# Altium PCB LINKER.PcbDoc (part 1 of 2)
Units mm, origin at the board's own origin, x right, y up, seen from the top; angles counter-clockwise.
Board outline 200 x 129 mm, 4 copper layers (Top Layer, Mid1, Mid2, Bottom Layer), stack 0.603 mm thick; 27 components, 98 nets, 425 pads, 14 vias.
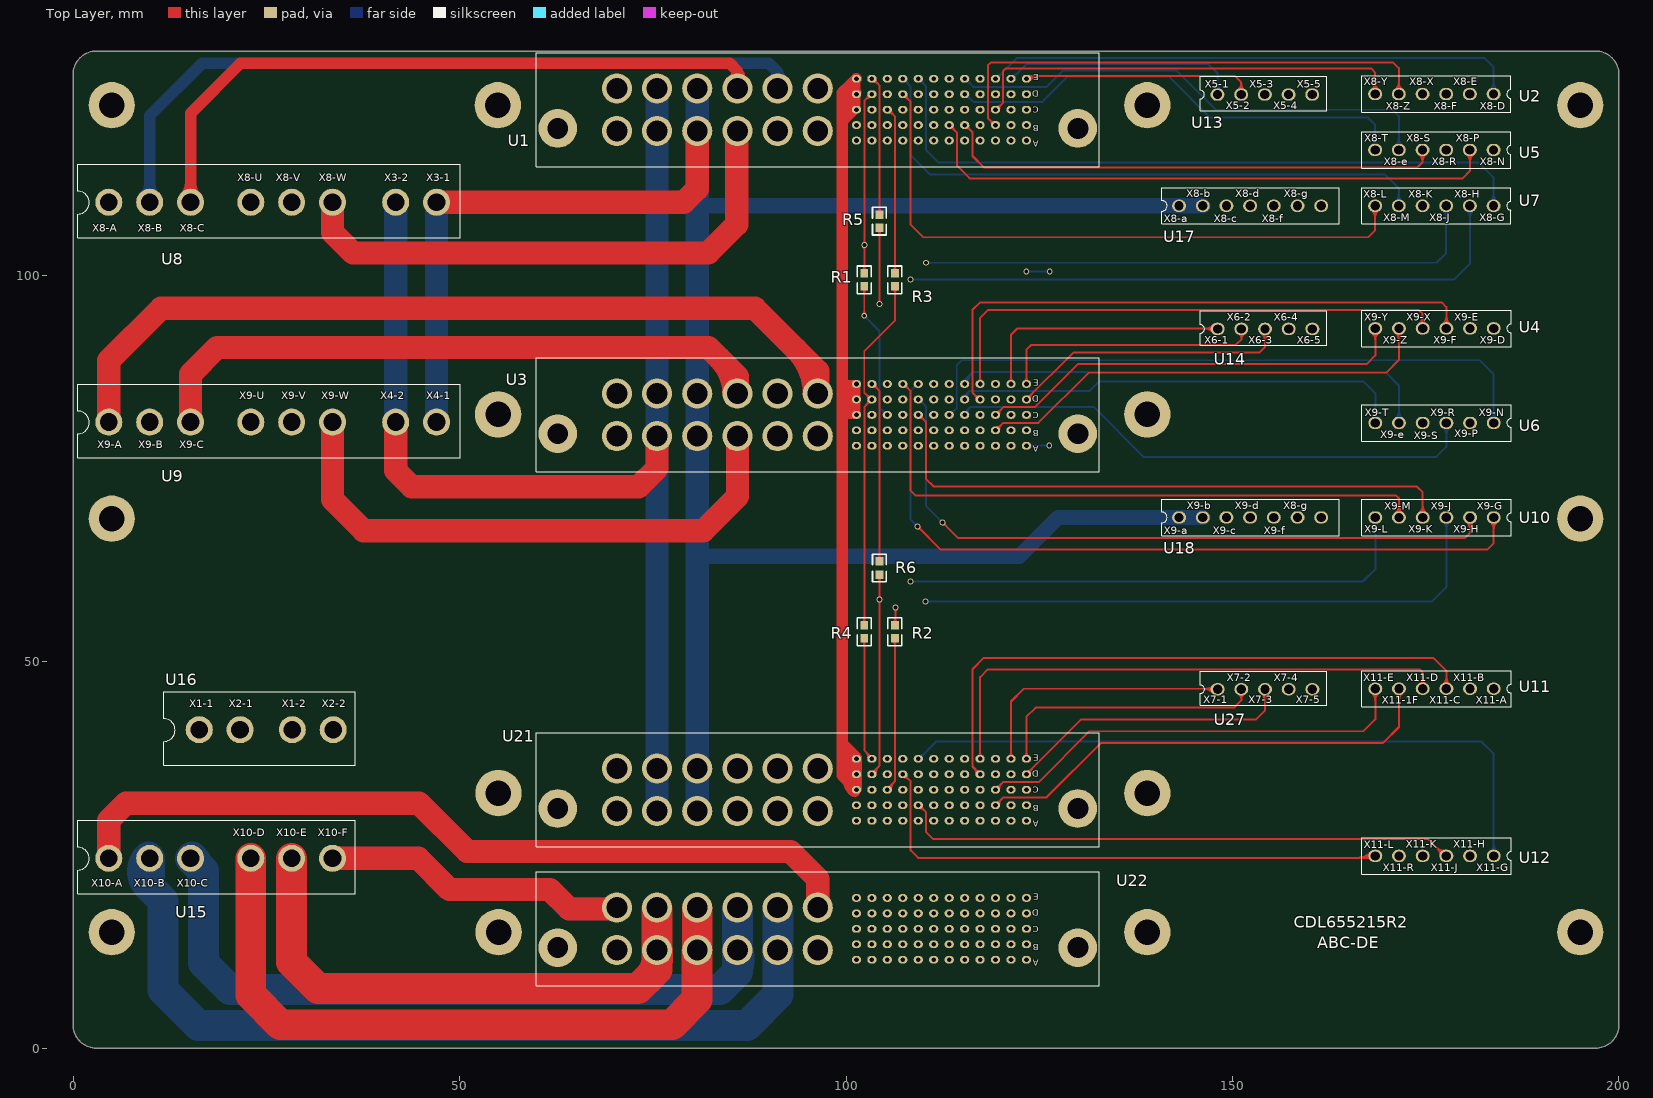
[diagram p0: Top Layer view]
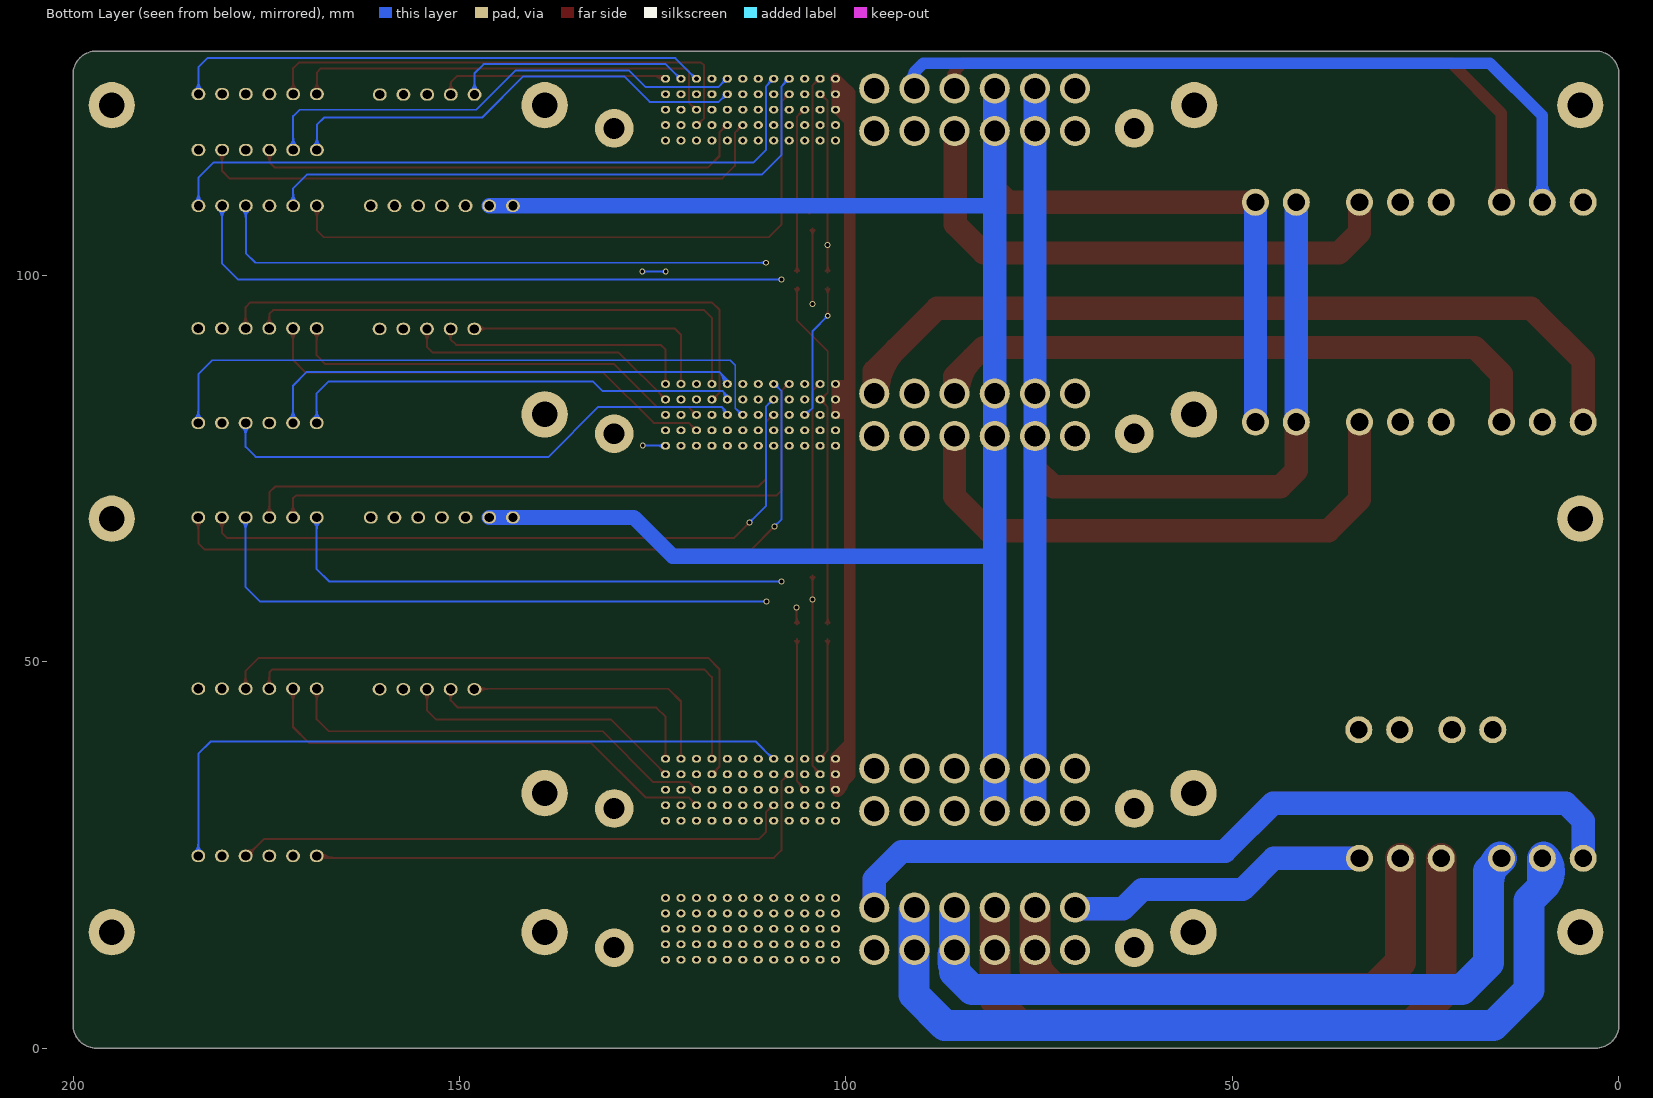
[diagram p1: Bottom Layer view, seen from below]
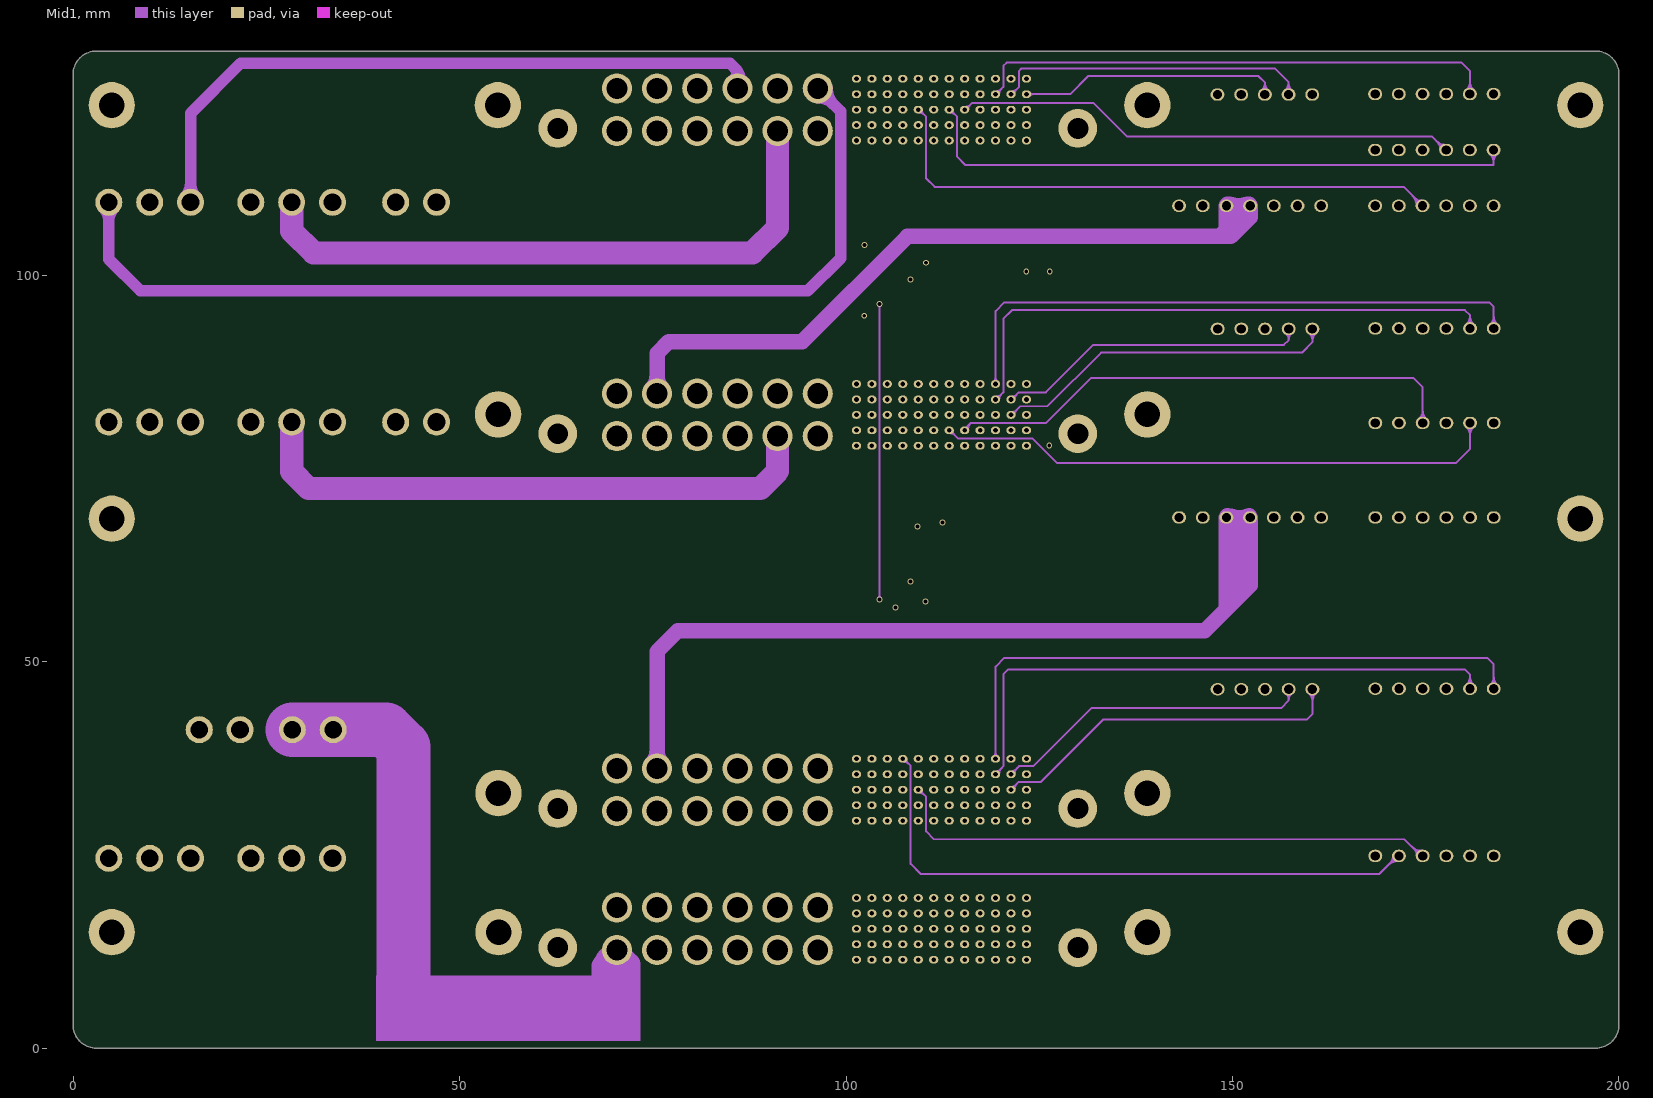
[diagram p2: Mid1]
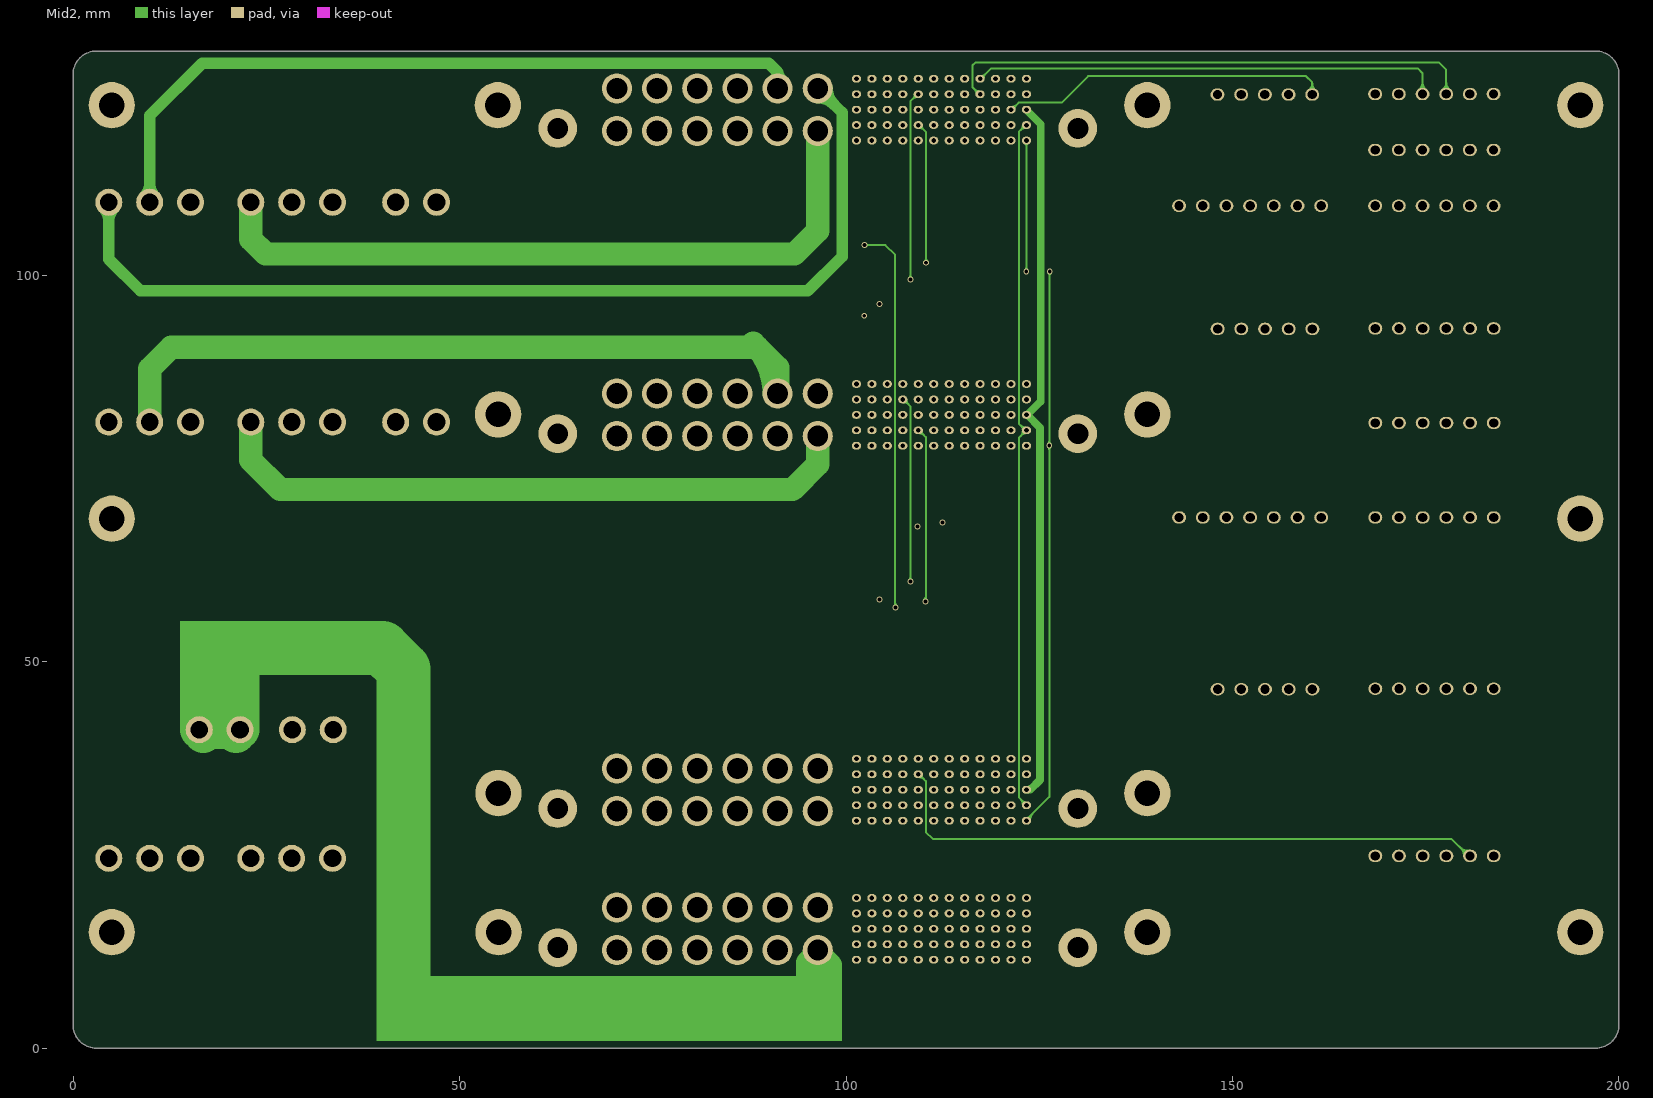
[diagram p3: Mid2]

## Layer stack, top to bottom
Top Solder: solder mask 0.0102, Solder Resist, Dk 3.5
Top Layer: signal copper 0.0356
Dielectric1: prepreg 0.0711, PP-006, Dk 4.1
Mid1: signal copper 0.035
Dielectric2: prepreg 0.0711, PP-006, Dk 4.1
Mid2: signal copper 0.035
Dielectric3: dielectric 0.32, FR-4, Dk 4.8
Bottom Layer: signal copper 0.0356
Bottom Solder: solder mask 0.0102, Solder Resist, Dk 3.5

## Board outline
0,3 0,126 cw(c3,126) 3,129 197,129 cw(c197,126) 200,126 200,3 cw(c197,3) 197,0 3,0 cw(c3,3)

## Design rules (kind name [scope] priority, off if disabled: settings)
Clearance Clearance_3 [InNetClass('HVGNDVCC') vs InNet('SYNC_OUT2')] p1: gap=0.254 ignorepadtopadclearanceinfootprint=FALSE except(0: Arc-Hole Track-Hole SMDPad-Hole THPad-Hole Via-Hole Fill-Hole Poly-Hole Region-Hole Text-Hole)
Clearance Clearance_2 [InNetClass('HVGNDVCC') vs InNet('SYNC_OUT1')] p2: gap=0.254 ignorepadtopadclearanceinfootprint=FALSE except(0: Arc-Hole Track-Hole SMDPad-Hole THPad-Hole Via-Hole Fill-Hole Poly-Hole Region-Hole Text-Hole)
Clearance Clearance_1 [InNetClass('HV')] p3: gap=0.5 ignorepadtopadclearanceinfootprint=FALSE except(0: Arc-Hole Track-Hole SMDPad-Hole THPad-Hole Via-Hole Fill-Hole Poly-Hole Region-Hole Text-Hole)
Clearance Clearance_board [InNetClass('HV') vs InNetClass('HV')] p4: gap=0.5 ignorepadtopadclearanceinfootprint=FALSE except(0: Arc-Hole Track-Hole SMDPad-Hole THPad-Hole Via-Hole Fill-Hole Poly-Hole Region-Hole Text-Hole)
Clearance [All] p5: gap=0.254 ignorepadtopadclearanceinfootprint=FALSE except(0: Arc-Hole Track-Hole SMDPad-Hole THPad-Hole Via-Hole Fill-Hole Poly-Hole Region-Hole Text-Hole)
FabricationTestpoint [(IsPad And (OnTopLayer Or OnBottomLayer))] p1: side=3 testpointundercomponent=TRUE minsize=1.016 maxsize=2.54 preferedsize=1.524 minholesize=0 maxholesize=1.016 preferedholesize=0.813 testpointgrid=0.025 allowsidetop=TRUE allowsidebottom=TRUE usegrid=TRUE gridtolerance=0
HoleSize [All] p1: absolutevalues=TRUE maxlimit=5 minlimit=0.025 maxpercent=80.000 minpercent=20.000
HoleToHoleClearance [All] p1: gap=0.05 allowstackedmicrovias=TRUE
MinimumSolderMaskSliver [All] p1: minsoldermaskwidth=0.05
PolygonConnect [All] p1: connectstyle=Relief reliefconductorwidth=0.254 reliefentries=4 polygonreliefangle="90 Angle" airgapwidth=0.254
RoutingVias [All] p1: holewidth=0.508 width=0.762 viastyle="Through Hole" minholewidth=0.508 minwidth=0.762 maxholewidth=0.508 maxwidth=0.762
SilkToSilkClearance [All] p1: silktosilkclearance=0.05
SilkToSolderMaskClearance [IsPad] p1: minsilkscreentomaskgap=0.05 clearancetoexposedcopper=TRUE
SolderMaskExpansion [All] p1: expansion=0.102
Width [All] p1: maxlimit=7 minlimit=0.254 preferedwidth=0.254
24 further rules are at their usual default settings.

## Components (designator, comment, footprint, x,y, rotation, side; value= is the part's Value field where it differs from the comment)
R1 "1k" R1608-0603 102.369,99.395 r270 top
R2 "1k" R1608-0603 106.331,53.863 r270 top
R3 "1k" R1608-0603 106.331,99.395 r90 top
R4 "1k" R1608-0603 102.369,53.863 r270 top
R5 "1k" R1608-0603 104.331,107.01 r90 top
R6 "1k" R1608-0603 104.331,62.118 r90 top
U1 "LRM5-A60H12RB-Z1" LRM5-A60H12RB-Z1 96.35,121.43 r180 top locked
U2 "SINCOS" SINCOS 176.124,123.444 r180 top
U3 "LRM5-A60H12RB-Z1" LRM5-A60H12RB-Z1 96.35,81.93 r180 top locked
U4 "SINCOS" SINCOS 176.145,93.122 r180 top
U5 "SINCOS" SINCOS 176.124,116.212 r180 top
U6 "SINCOS" SINCOS 176.145,80.89 r180 top
U7 "SINCOS" SINCOS 176.124,108.981 r180 top
U8 "PWR" PWR 25.823,109.444 r0 top
U9 "PWR" PWR 25.823,80.996 r0 top
U10 "SINCOS" SINCOS 176.145,68.659 r180 top
U11 "SINCOS" SINCOS 176.145,46.5 r180 top
U12 "SINCOS" SINCOS 176.145,24.871 r180 top
U13 "RS422" RS422 154.194,123.38 r0 top
U14 "RS422" RS422 154.215,93.058 r0 top
U15 "RZ" RZ 19.093,24.562 r0 top
U16 "V270" V270 24.987,41.199 r0 top
U17 "PT1000" PT1000 152.289,108.981 r0 top
U18 "PT1000" PT1000 152.289,68.659 r0 top
U21 "LRM5-A60H12RB-Z1" LRM5-A60H12RB-Z1 96.35,33.43 r180 top locked
U22 "LRM5-A60H12RB-Z1" LRM5-A60H12RB-Z1 96.35,15.43 r180 top locked
U27 "RS422" RS422 154.215,46.436 r0 top

## Footprints (in the part's own frame and the unit in brackets; to place one, negate y for a bottom-side part, rotate by r counter-clockwise, add the part's x,y. Pads: shape width x height; smd on the part's side, far side on the other; paste and mask are expansions set on the pad)
LRM5-A60H12RB-Z1 [mm]
  round 5 hole 2.7: 0(-33.65,2.43) 0(33.65,2.43)
  round 3.9 hole 2.7: 1(0,-2.75) 2(5.2,-2.75) 3(10.4,-2.75) 4(15.6,-2.75) 5(20.8,-2.75) 6(26,-2.75) 7(0,2.75) 8(5.2,2.75) 9(10.4,2.75) 10(15.6,2.75) 11(20.8,2.75) 12(26,2.75)
  oval 1.2x1 hole 0.6: A1(-27,4) A2(-25,4) A3(-23,4) A4(-21,4) A5(-19,4) A6(-17,4) A7(-15,4) A8(-13,4) A9(-11,4) A10(-9,4) A11(-7,4) A12(-5,4) B1(-27,2) B2(-25,2) B3(-23,2) B4(-21,2) B5(-19,2) B6(-17,2) B7(-15,2) B8(-13,2) B9(-11,2) B10(-9,2) B11(-7,2) B12(-5,2) C1(-27,0) C2(-25,0) C3(-23,0) C4(-21,0) C5(-19,0) C6(-17,0) C7(-15,0) C8(-13,0) C9(-11,0) C10(-9,0) C11(-7,0) C12(-5,0) D1(-27,-2) D2(-25,-2) D3(-23,-2) D4(-21,-2) D5(-19,-2) D6(-17,-2) D7(-15,-2) D8(-13,-2) D9(-11,-2) D10(-9,-2) D11(-7,-2) D12(-5,-2) E1(-27,-4) E2(-25,-4) E3(-23,-4) E4(-21,-4) E5(-19,-4) E6(-17,-4) E7(-15,-4) E8(-13,-4) E9(-11,-4) E10(-9,-4) E11(-7,-4) E12(-5,-4)
  silkscreen extent -36.4,-7.36 36.4,7.36, body extent -37.72,-14.99 36.4,11.28, height 13.9
PT1000 [mm]
  oval 1.8x1.6 hole 1.2: 1(-9.193,0) 2(-6.129,0) 3(-3.064,0) 4(0,0) 5(3.064,0) 6(6.129,0) 7(9.193,0)
  silkscreen extent -11.43,-2.35 11.56,2.35
PWR [mm]
  round 3.5 hole 2.3: 1(-21.205,0) 2(-15.915,0) 3(-10.624,0) 4(-2.836,0) 5(2.455,0) 6(7.746,0) 7(15.915,0) 8(21.205,0)
  silkscreen extent -25.22,-4.61 24.28,4.91
R1608-0603 [mm]
  rect 1.1x1 smd: 1(-0.85,0) 2(0.85,0)
  silkscreen extent -1.8,-0.9 1.8,0.9, body extent -0.78,-0.39 0.82,0.41, height 0.51
RS422 [mm]
  oval 1.8x1.6 hole 1.2: 1(-6.129,0) 2(-3.064,0) 3(0,0) 4(3.064,0) 5(6.129,0)
  silkscreen extent -8.37,-2.1 8.02,2.35
RZ [mm]
  round 3.5 hole 2.3: 1(-14.476,0) 2(-9.185,0) 3(-3.894,0) 4(3.894,0) 5(9.185,0) 6(14.476,0)
  silkscreen extent -18.49,-4.61 17.4,4.91
SINCOS [mm]
  oval 1.8x1.6 hole 1.2: 1(-7.661,0) 2(-4.596,0) 3(-1.532,0) 4(1.532,0) 5(4.597,0) 6(7.661,0)
  silkscreen extent -9.9,-2.35 9.41,2.35
V270 [mm]
  round 3.5 hole 2.3: 1(-8.667,0) 2(-3.376,0) 3(3.376,0) 4(8.667,0)
  silkscreen extent -13.28,-4.61 11.5,4.91

## Part data
R1 R2 R3 R4 R5 R6: library part RMK1608MB, "电阻器"
U1 U3 U21 U22: library part MULTI_HEADER

## Free pads (board coordinates)
  round 6 hole 3.3: 0(5,15) 0(5,68.5) 0(5,122) 0(54.95,122) 0(54.987,82) 0(55.032,33) 0(55.049,15) 0(138.985,15) 0(138.985,33) 0(138.985,82) 0(138.985,122) 0(195,15) 0(195,68.5) 0(195,122)

## Via types
v1: diameter 0.762, hole 0.508, Top Layer to Bottom Layer, 14 vias

## Nets (pads, with @x,y where several pads share a name; then routed paths per layer and width w, separated by ;. In a path a pad name is that pad's centre, name@x,y a point inside that pad or via, vN(x,y) a via of type N, cw(c..) or ccw(c..) an arc to the next point about the centre after c; other vN are vias at no path point)
A_COS+1: U1.D4 U2.3 | length 74.7
  Mid2 w0.254: 116.603,124.091 cw(c115.943,123.43) U1.D4@116.877,123.43 ; 116.637,124.057 ccw(c117.25,124.67) U1.D4@117.25,123.803 ; U1.D4@117.35,123.444 117.25,123.444 116.369,124.325 116.369,127.142 116.75,127.523 176.744,127.523 177.657,126.61 U2.3@177.657,123.444 ; U2.3@177.181,123.92 ccw(c176.032,125.069) 177.657,125.069 ccw(c179.281,125.069) U2.3@178.133,123.92 ; U2.3@177.36,123.74 ccw(c176.645,124.456) 177.657,124.456 ccw(c178.668,124.456) U2.3@177.953,123.74
A_COS+2: U3.D4 U4.3 | length 82.3
  Top Layer w0.254: U3.D4@116.877,83.93 ccw(c115.976,83.93) 116.613,84.567 ccw(c117.25,85.203) U3.D4@117.25,84.303 ; U3.D4@117.35,83.93 117.25,83.93 116.369,84.811 116.369,95.513 117.356,96.5 177.058,96.5 177.677,95.881 U4.3@177.677,93.122 ; U4.3@177.201,93.598 ccw(c176.052,94.747) 177.677,94.747 ccw(c179.302,94.747) U4.3@178.153,93.598 ; U4.3@177.381,93.418 ccw(c176.665,94.134) 177.677,94.134 ccw(c178.689,94.134) U4.3@177.973,93.418
A_COS+3: U11.3 U21.D4 | length 84.9
  Top Layer w0.254: 116.521,36.289 cw(c115.663,35.43) U21.D4@116.877,35.43 ; 116.835,35.975 ccw(c117.25,36.39) U21.D4@117.25,35.803 ; 116.955,35.855 cw(c116.53,35.43) U21.D4@117.131,35.43 ; U21.D4@117.35,35.56 117.25,35.56 116.369,36.441 116.369,49.019 117.85,50.5 176,50.5 177.677,48.823 U11.3@177.677,46.5 ; U11.3@177.201,46.976 ccw(c176.052,48.125) 177.677,48.125 ccw(c179.302,48.125) U11.3@178.153,46.976 ; U11.3@177.381,46.796 ccw(c176.665,47.512) 177.677,47.512 ccw(c178.689,47.512) U11.3@177.973,46.796
A_COS-1: U1.E4 U2.4 | length 66.3
  Mid2 w0.254: U1.E4@117.35,125.444 117.45,125.444 118.767,126.761 173.95,126.761 174.592,126.118 U2.4@174.592,123.444 ; U1.E4@117.45,125.803 ccw(c117.45,126.67) 118.063,126.057 ; U1.E4@117.823,125.43 cw(c118.757,125.43) 118.097,126.091 ; U2.4@174.116,123.92 ccw(c172.968,125.069) 174.592,125.069 ccw(c176.217,125.069) U2.4@175.068,123.92 ; U2.4@174.296,123.74 ccw(c173.581,124.456) 174.592,124.456 ccw(c175.604,124.456) U2.4@174.889,123.74
A_COS-2: U3.E4 U4.4 | length 73.9
  Top Layer w0.254: U3.E4@117.086,86.194 ccw(c116.449,86.831) 117.35,86.831 ccw(c118.25,86.83) U3.E4@117.614,86.194 ; U3.E4@117.35,85.93 117.35,94.494 118.356,95.5 174.134,95.5 174.613,95.021 U4.4@174.613,93.122 ; U4.4@174.137,93.598 ccw(c172.988,94.747) 174.613,94.747 ccw(c176.237,94.747) U4.4@175.089,93.598 ; U4.4@174.316,93.418 ccw(c173.601,94.134) 174.613,94.134 ccw(c175.624,94.134) U4.4@174.909,93.418
A_COS-3: U11.4 U21.E4 | length 75.9
  Top Layer w0.254: U21.E4@117.086,37.694 ccw(c116.449,38.331) 117.35,38.331 ccw(c118.25,38.33) U21.E4@117.614,37.694 ; U21.E4@117.35,37.56 117.35,48 118.35,49 174.215,49 174.613,48.603 U11.4@174.613,46.5 ; U11.4@174.137,46.976 ccw(c172.988,48.125) 174.613,48.125 ccw(c176.237,48.125) U11.4@175.089,46.976 ; U11.4@174.316,46.796 ccw(c173.601,47.512) 174.613,47.512 ccw(c175.624,47.512) U11.4@174.909,46.796
A_EXCN1: U1.B3 U2.5 | length 70.7
  Top Layer w0.254: 118.603,120.091 cw(c117.943,119.43) U1.B3@118.877,119.43 ; 118.637,120.057 ccw(c119.25,120.67) U1.B3@119.25,119.803 ; U1.B3@119.35,119.444 119.25,119.444 118.369,120.325 118.369,127.147 118.745,127.523 170.8,127.523 171.528,126.795 U2.5@171.528,123.444 ; U2.5@171.052,123.92 ccw(c169.903,125.069) 171.528,125.069 ccw(c173.153,125.069) U2.5@172.004,123.92 ; U2.5@171.232,123.74 ccw(c170.516,124.456) 171.528,124.456 ccw(c172.54,124.456) U2.5@171.824,123.74
A_EXCN2: U3.B3 U4.5 | length 65.6
  Top Layer w0.254: U3.B3@119.35,79.93 120.319,80.899 124.899,80.899 131.386,87.386 169.886,87.386 171.548,89.048 U4.5@171.548,93.122 ; U3.B3@119.45,80.303 ccw(c119.45,80.962) 119.916,80.496 ; U3.B3@119.823,79.93 cw(c120.965,79.93) 120.157,80.738 ; U4.5@171.072,92.646 cw(c169.924,91.497) 171.548,91.497 cw(c173.173,91.497) U4.5@172.024,92.646 ; U4.5@171.252,92.826 cw(c170.537,92.11) 171.548,92.11 cw(c172.56,92.11) U4.5@171.845,92.826
A_EXCN3: U11.5 U21.B3 | length 67.3
  Top Layer w0.254: U21.B3@119.35,31.56 119.45,31.56 120.331,32.441 125.941,32.441 133,39.5 169.5,39.5 171.548,41.548 U11.5@171.548,46.5 ; U21.B3@119.45,31.803 ccw(c119.45,32.39) 119.865,31.975 ; U21.B3@119.569,31.43 cw(c120.17,31.43) 119.745,31.855 ; U21.B3@119.823,31.43 cw(c121.037,31.43) 120.179,32.289 ; U11.5@171.072,46.024 cw(c169.924,44.875) 171.548,44.875 cw(c173.173,44.875) U11.5@172.024,46.024 ; U11.5@171.252,46.204 cw(c170.537,45.488) 171.548,45.488 cw(c172.56,45.488) U11.5@171.845,46.204
A_EXCP1: U1.C3 U2.6 | length 62.3
  Top Layer w0.254: U1.C3@119.35,121.444 119.45,121.444 120.331,122.325 120.331,126.442 120.65,126.761 167.93,126.761 168.464,126.227 U2.6@168.464,123.444 ; U1.C3@119.45,121.803 ccw(c119.45,122.67) 120.063,122.057 ; U1.C3@119.823,121.43 cw(c120.757,121.43) 120.097,122.091 ; U2.6@167.988,123.92 ccw(c166.839,125.069) 168.464,125.069 ccw(c170.088,125.069) U2.6@168.94,123.92 ; U2.6@168.167,123.74 ccw(c167.452,124.456) 168.464,124.456 ccw(c169.475,124.456) U2.6@168.76,123.74
A_EXCP2: U3.C3 U4.6 | length 61.5
  Top Layer w0.254: U3.C3@119.45,81.93 U3.C3@119.35,81.93 120.351,82.931 124.431,82.931 130,88.5 167.362,88.5 168.484,89.622 U4.6@168.484,93.122 ; U3.C3@119.45,82.303 ccw(c119.45,82.962) 119.916,82.496 ; U3.C3@119.823,81.93 cw(c120.965,81.93) 120.157,82.738 ; U4.6@168.008,92.646 cw(c166.859,91.497) 168.484,91.497 cw(c170.109,91.497) U4.6@168.96,92.646 ; U4.6@168.188,92.826 cw(c167.472,92.11) 168.484,92.11 cw(c169.496,92.11) U4.6@168.78,92.826
A_EXCP3: U11.6 U21.C3 | length 62.8
  Top Layer w0.254: U21.C3@119.35,33.56 119.45,33.56 120.307,34.417 124.917,34.417 131.5,41 166.936,41 168.484,42.548 U11.6@168.484,46.5 ; U21.C3@119.45,33.803 ccw(c119.45,34.39) 119.865,33.975 ; U21.C3@119.569,33.43 cw(c120.17,33.43) 119.745,33.855 ; U21.C3@119.823,33.43 cw(c121.037,33.43) 120.179,34.289 ; U11.6@168.008,46.024 cw(c166.859,44.875) 168.484,44.875 cw(c170.109,44.875) U11.6@168.96,46.024 ; U11.6@168.188,46.204 cw(c167.472,45.488) 168.484,45.488 cw(c169.496,45.488) U11.6@168.78,46.204
A_SIN+1: U1.E3 U2.1 | length 75
  Bottom Layer w0.254: U1.E3@119.35,125.444 119.45,125.444 122.088,128.082 182.636,128.082 183.785,126.933 U2.1@183.785,123.444 ; U1.E3@119.45,125.803 ccw(c119.45,126.67) 120.063,126.057 ; U1.E3@119.823,125.43 cw(c120.757,125.43) 120.097,126.091 ; U2.1@183.309,123.92 ccw(c182.161,125.069) 183.785,125.069 ccw(c185.41,125.069) U2.1@184.261,123.92 ; U2.1@183.489,123.74 ccw(c182.774,124.456) 183.785,124.456 ccw(c184.797,124.456) U2.1@184.082,123.74
A_SIN+2: U3.E3 U4.1 | length 83
  Mid1 w0.254: U3.E3@119.086,86.194 ccw(c118.449,86.831) 119.35,86.831 ccw(c120.25,86.831) U3.E3@119.614,86.194 ; U3.E3@119.35,85.93 119.35,95.35 120.5,96.5 183.256,96.5 183.806,95.95 U4.1@183.806,93.122 ; U4.1@183.33,93.598 ccw(c182.181,94.747) 183.806,94.747 ccw(c185.43,94.747) U4.1@184.282,93.598 ; U4.1@183.509,93.418 ccw(c182.794,94.134) 183.806,94.134 ccw(c184.817,94.134) U4.1@184.102,93.418
A_SIN+3: U11.1 U21.E3 | length 85.8
  Mid1 w0.254: U21.E3@119.086,37.694 ccw(c118.449,38.331) 119.35,38.331 ccw(c120.25,38.33) U21.E3@119.614,37.694 ; U21.E3@119.35,37.56 119.35,49.35 120.5,50.5 182.951,50.5 183.806,49.646 U11.1@183.806,46.5 ; U11.1@183.33,46.976 ccw(c182.181,48.125) 183.806,48.125 ccw(c185.43,48.125) U11.1@184.282,46.976 ; U11.1@183.509,46.796 ccw(c182.794,47.512) 183.806,47.512 ccw(c184.817,47.512) U11.1@184.102,46.796
A_SIN-1: U1.D3 U2.2 | length 73.7
  Mid1 w0.254: U1.D3@119.35,123.444 119.45,123.444 120.369,124.363 120.369,127.115 120.777,127.523 179.639,127.523 180.721,126.441 U2.2@180.721,123.444 ; U1.D3@119.45,123.803 ccw(c119.45,124.67) 120.063,124.057 ; U1.D3@119.823,123.43 cw(c120.757,123.43) 120.097,124.091 ; U2.2@180.245,123.92 ccw(c179.096,125.069) 180.721,125.069 ccw(c182.346,125.069) U2.2@181.197,123.92 ; U2.2@180.425,123.74 ccw(c179.709,124.456) 180.721,124.456 ccw(c181.733,124.456) U2.2@181.017,123.74
A_SIN-2: U3.D3 U4.2 | length 79.3
  Mid1 w0.254: U3.D3@119.35,83.93 119.45,83.93 120.369,84.849 120.369,94.389 121.48,95.5 180.065,95.5 180.741,94.823 U4.2@180.741,93.122 ; U3.D3@119.45,84.303 ccw(c119.45,85.204) 120.087,84.567 ccw(c120.723,83.93) U3.D3@119.823,83.93 ; U4.2@180.265,93.598 ccw(c179.117,94.747) 180.741,94.747 ccw(c182.366,94.747) U4.2@181.217,93.598 ; U4.2@180.445,93.418 ccw(c179.73,94.134) 180.741,94.134 ccw(c181.753,94.134) U4.2@181.038,93.418
A_SIN-3: U11.2 U21.D3 | length 82.2
  Mid1 w0.254: U21.D3@119.35,35.43 119.35,35.46 U21.D3@119.45,35.56 ; U21.D3@119.35,35.56 U21.D3@119.45,35.56 ; U21.D3@119.45,35.803 ccw(c119.45,36.39) 119.865,35.975 ; U21.D3@119.569,35.43 cw(c120.17,35.43) 119.745,35.855 ; U21.D3@119.823,35.43 cw(c121.037,35.43) 120.179,36.289 ; U11.2@180.265,46.976 ccw(c179.117,48.125) 180.741,48.125 ccw(c182.366,48.125) U11.2@181.217,46.976 ; U11.2@180.445,46.796 ccw(c179.73,47.512) 180.741,47.512 ccw(c181.753,47.512) U11.2@181.038,46.796 ; U11.2@180.741,46.5 180.741,48.316 180.057,49 121,49 120.369,48.369 120.369,36.479 U21.D3@119.45,35.56
BC_COS+1: U1.C5 U5.3 | length 70.8
  Mid1 w0.254: U1.C5@115.35,121.43 115.45,121.43 116.331,122.311 131.994,122.311 136.347,117.958 175.812,117.958 177.557,116.212 U5.3@177.657,116.212 ; U1.C5@115.45,121.803 ccw(c115.45,122.704) 116.087,122.067 ccw(c116.723,121.43) U1.C5@115.823,121.43 ; U5.3@176.884,116.212 ccw(c175.259,116.212) 176.408,117.361 ccw(c177.557,118.51) U5.3@177.557,116.885 ; U5.3@177.138,116.212 ccw(c176.126,116.212) 176.841,116.928 ccw(c177.557,117.643) U5.3@177.557,116.631
BC_COS+2: U3.C5 U6.3 | length 75.1
  Bottom Layer w0.254: U3.C5@115.35,81.93 115.35,82.228 116.078,82.956 ; U3.C5@115.566,81.958 cw(c116.267,82.126) 115.757,82.635 ; U3.C5@115.813,82.017 cw(c116.785,82.25) 116.078,82.956 ; U6.3@177.201,80.415 cw(c176.052,79.266) 177.677,79.266 cw(c179.302,79.266) U6.3@178.153,80.415 ; U6.3@177.381,80.594 cw(c176.665,79.879) 177.677,79.879 cw(c178.689,79.879) U6.3@177.973,80.594 ; U6.3@177.677,80.89 177.677,77.804 176.373,76.5 138.486,76.5 132.029,82.956 116.078,82.956
BC_COS-1: U1.B5 U5.4 | length 70.5
  Top Layer w0.254: U1.B5@115.35,119.444 115.45,119.444 116.369,118.525 116.369,115.431 117.866,113.934 173.878,113.934 174.592,114.648 ; U1.B5@115.45,119.057 cw(c115.45,118.123) 116.111,118.783 ; U1.B5@115.823,119.43 ccw(c116.69,119.43) 116.077,118.817 ; U5.4@174.13,115.724 cw(c173.111,114.648) 174.592,114.648 ; U5.4@174.304,115.908 cw(c173.67,115.239) 174.592,115.239 cw(c175.514,115.239) U5.4@174.88,115.908 ; U5.4@174.592,116.212 174.592,114.648 ; U5.4@175.055,115.724 ccw(c176.073,114.648) 174.592,114.648
BC_COS-2: U3.B5 U6.4 | length 73.1
  Mid1 w0.254: U3.B5@115.35,79.93 115.35,80.095 116.154,80.899 ; U3.B5@115.568,79.942 cw(c116.282,80.013) 115.775,80.52 ; U3.B5@115.821,79.967 cw(c116.972,80.081) 116.154,80.899 ; U6.4@174.137,81.366 ccw(c172.988,82.515) 174.613,82.515 ccw(c176.237,82.515) U6.4@175.089,81.366 ; U6.4@174.316,81.187 ccw(c173.601,81.902) 174.613,81.902 ccw(c175.624,81.902) U6.4@174.909,81.187 ; U6.4@174.613,80.89 174.613,85.534 173.416,86.731 131.731,86.731 125.899,80.899 116.154,80.899
BC_EXCN1: U1.E5 U5.5 | length 69.9
  Bottom Layer w0.254: U1.E5@115.35,125.444 115.45,125.444 116.546,124.348 125.92,124.348 128.054,126.482 142.773,126.482 147.843,121.412 170.703,121.412 171.528,120.587 U5.5@171.528,116.212 ; U1.E5@115.45,125.057 cw(c115.45,124.123) 116.111,124.783 ; U1.E5@115.823,125.43 ccw(c116.69,125.43) 116.077,124.817 ; U5.5@171.052,116.688 ccw(c169.903,117.837) 171.528,117.837 ccw(c173.153,117.837) U5.5@172.004,116.688 ; U5.5@171.232,116.509 ccw(c170.516,117.224) 171.528,117.224 ccw(c172.54,117.224) U5.5@171.824,116.509
BC_EXCN2: U3.E5 U6.5 | length 70.7
  Bottom Layer w0.254: U3.E5@115.315,85.918 cw(c116.333,86.008) 115.611,86.731 ; U3.E5@115.35,85.93 115.35,86.47 116.38,87.5 ; U3.E5@115.568,85.941 cw(c117.039,86.071) 115.995,87.115 ; U3.E5@115.821,85.963 cw(c117.746,86.134) 116.38,87.5 ; U6.5@171.072,81.366 ccw(c169.924,82.515) 171.548,82.515 ccw(c173.173,82.515) U6.5@172.024,81.366 ; U6.5@171.252,81.187 ccw(c170.537,81.902) 171.548,81.902 ccw(c172.56,81.902) U6.5@171.845,81.187 ; U6.5@171.548,80.89 171.548,85.703 169.751,87.5 116.38,87.5
BC_EXCP1: U1.D5 U5.6 | length 66.3
  Bottom Layer w0.254: U1.D5@115.35,123.444 115.45,123.444 116.466,122.428 125.4,122.428 128.691,125.72 141.757,125.72 147.066,120.411 167.513,120.411 168.464,119.46 U5.6@168.464,116.212 ; U1.D5@115.45,123.057 cw(c115.45,122.123) 116.111,122.783 ; U1.D5@115.823,123.43 ccw(c116.69,123.43) 116.077,122.817 ; U5.6@167.988,116.688 ccw(c166.839,117.837) 168.464,117.837 ccw(c170.088,117.837) U5.6@168.94,116.688 ; U5.6@168.167,116.509 ccw(c167.452,117.224) 168.464,117.224 ccw(c169.475,117.224) U5.6@168.76,116.509
BC_EXCP2: U3.D5 U6.6 | length 65.6
  Bottom Layer w0.254: U3.D5@115.325,83.878 cw(c115.862,84.102) 115.451,84.513 ; U3.D5@115.35,83.93 115.35,84.413 115.986,85.049 ; U3.D5@115.56,83.976 cw(c116.239,84.26) 115.718,84.781 ; U3.D5@115.794,84.074 cw(c116.617,84.418) 115.986,85.049 ; U6.6@168.008,81.366 ccw(c166.859,82.515) 168.484,82.515 ccw(c170.109,82.515) U6.6@168.96,81.366 ; U6.6@168.188,81.187 ccw(c167.472,81.902) 168.484,81.902 ccw(c169.496,81.902) U6.6@168.78,81.187 ; U6.6@168.484,80.89 168.484,84.703 166.914,86.273 132.74,86.273 131.516,85.049 115.986,85.049
BC_SIN+1: U1.C6 U5.1 | length 83.9
  Mid1 w0.254: U1.C6@113.35,121.43 113.464,121.43 114.369,120.525 114.369,115.349 115.452,114.266 183.785,114.266 U5.1@183.785,116.212 ; U1.C6@113.45,121.057 cw(c113.45,120.123) 114.111,120.783 ; U1.C6@113.823,121.43 ccw(c114.69,121.43) 114.077,120.817 ; U5.1@183.309,115.737 cw(c182.161,114.588) 183.785,114.588 cw(c185.41,114.588) U5.1@184.261,115.737 ; U5.1@183.489,115.916 cw(c182.774,115.201) 183.785,115.201 cw(c184.797,115.201) U5.1@184.082,115.916
BC_SIN+2: U3.C6 U6.1 | length 89.2
  Bottom Layer w0.254: U3.C6@113.35,81.93 113.45,81.93 114.331,82.811 114.331,88.331 115,89 182,89 183.806,87.194 U6.1@183.806,80.89 ; U3.C6@113.45,82.303 ccw(c113.45,83.204) 114.087,82.567 ccw(c114.723,81.93) U3.C6@113.823,81.93 ; U6.1@183.33,81.366 ccw(c182.181,82.515) 183.806,82.515 ccw(c185.43,82.515) U6.1@184.282,81.366 ; U6.1@183.509,81.187 ccw(c182.794,81.902) 183.806,81.902 ccw(c184.817,81.902) U6.1@184.102,81.187
BC_SIN-1: U1.B6 U5.2 | length 81.4
  Top Layer w0.254: U1.B6@113.35,119.444 113.357,119.437 114.369,118.425 114.369,114.155 115.987,112.537 179.771,112.537 180.721,113.487 U5.2@180.721,116.212 ; U1.B6@113.45,119.057 cw(c113.45,118.364) 113.94,118.854 ; U1.B6@113.823,119.43 ccw(c114.931,119.43) 114.148,118.646 ; U5.2@180.245,115.737 cw(c179.096,114.588) 180.721,114.588 cw(c182.346,114.588) U5.2@181.197,115.737 ; U5.2@180.425,115.916 cw(c179.709,115.201) 180.721,115.201 cw(c181.733,115.201) U5.2@181.017,115.916
BC_SIN-2: U3.B6 U6.2 | length 78.8
  Mid1 w0.254: U3.B6@113.35,79.93 113.45,79.93 114.486,78.894 124.106,78.894 127.308,75.692 178.867,75.692 180.741,77.567 U6.2@180.741,80.89 ; U3.B6@113.45,79.557 cw(c113.45,78.656) 114.087,79.293 cw(c114.723,79.93) U3.B6@113.823,79.93 ; U6.2@180.265,80.415 cw(c179.117,79.266) 180.741,79.266 cw(c182.366,79.266) U6.2@181.217,80.415 ; U6.2@180.445,80.594 cw(c179.73,79.879) 180.741,79.879 cw(c181.753,79.879) U6.2@181.038,80.594
CANGNDM: U1.C1 U3.C1 U21.C1 | length 92
  Mid2 w0.254: U3.C1@123.35,81.93 U3.C1@123.45,81.93 ; U1.C1@123.35,121.444 123.357,121.437 123.577,121.217 U1.C1@123.577,121.167
  Mid2 w1: U21.C1@123.35,33.43 123.839,33.43 125.095,34.686 125.095,80.285 123.45,81.93 125.197,83.677 125.197,119.547 U1.C1@123.577,121.167 ; U21.C1@123.45,33.43 ccw(c123.45,34.369) 124.114,33.705
CANHM: U1.B1 U3.B1 U21.B1 | length 95.8
  Mid2 w0.254: 122.521,32.289 cw(c121.663,31.43) U21.B1@122.877,31.43 ; 122.543,79.123 ccw(c121.735,79.93) 122.877,79.93 ccw(c121.976,79.93) 122.613,80.567 ccw(c123.25,81.203) U3.B1@123.25,80.303 ; 122.589,118.783 cw(c123.25,118.123) U1.B1@123.25,119.057 ; 122.623,118.817 ccw(c122.01,119.43) U1.B1@122.877,119.43 ; 122.784,79.364 cw(c123.25,78.898) U3.B1@123.25,79.557 ; 122.835,31.975 ccw(c123.25,32.39) U21.B1@123.25,31.803 ; 122.955,31.855 cw(c122.53,31.43) U21.B1@123.131,31.43 ; U21.B1@123.35,31.56 123.25,31.56 122.369,32.441 122.369,78.949 U3.B1@123.35,79.93 123.25,79.93 122.369,80.811 122.369,118.563 123.25,119.444 U1.B1@123.35,119.444
CANLM: U1.A1 U3.A1 U21.A1 | length 106.8
  Mid2 w0.254: U1.A1@123.086,117.166 cw(c122.489,116.569) 123.333,116.569 ; v1@123.137,100.652 ccw(c122.664,101.125) 123.333,101.125 ; v1(123.317,100.472) 123.333,100.488 123.333,117.427 123.343,117.437 U1.A1@123.35,117.444 ; 123.333,101.045 ccw(c123.89,101.045) v1@123.497,100.652 ; 123.333,116.49 cw(c124.29,116.49) U1.A1@123.614,117.166 ; U21.A1@123.35,29.56 126.301,32.512 v1(126.301,77.994) 126.301,100.408 v1(126.365,100.472) ; U21.A1@123.45,29.803 ccw(c123.45,30.148) 123.694,29.904 ; U21.A1@123.569,29.43 cw(c124.411,29.43) 123.816,30.026 ; U21.A1@123.823,29.43 cw(c125.279,29.43) 124.249,30.459 ; v1@126.122,77.814 cw(c125.688,77.38) 126.301,77.38 cw(c126.915,77.38) v1@126.481,77.814 ; v1@126.122,78.173 ccw(c125.688,78.607) 126.301,78.607 ccw(c126.915,78.607) v1@126.481,78.173 ; v1@126.185,100.292 cw(c125.905,100.012) 126.301,100.012 ; 126.301,99.705 cw(c127.131,99.705) v1@126.545,100.292
  Bottom Layer w0.254: v1(123.317,100.472) 126.348,100.472 126.357,100.48 v1@126.365,100.488 ; U3.A1@123.35,77.93 123.382,77.962 126.27,77.962 v1(126.301,77.994) ; v1@123.497,100.292 cw(c123.93,99.859) 123.93,100.472 cw(c123.93,101.085) v1@123.497,100.652 ; U3.A1@123.714,77.666 cw(c124.427,76.953) 124.427,77.962 ; U3.A1@123.714,78.194 ccw(c124.274,78.754) 124.274,77.962 ; 125.612,77.962 ccw(c125.612,78.683) v1@126.122,78.173 ; 125.765,77.962 cw(c125.765,77.457) v1@126.122,77.814 ; v1@126.185,100.292 ccw(c125.752,99.859) 125.752,100.472 ccw(c125.752,101.085) v1@126.185,100.652
D_COS+1: U1.B8 U7.3 | length 99.7
  Mid2 w0.254: U1.B8@109.35,119.444 109.45,119.444 110.363,118.531 v1(110.363,101.615) ; U1.B8@109.45,119.057 cw(c109.45,118.123) 110.111,118.783 ; U1.B8@109.823,119.43 ccw(c110.69,119.43) 110.077,118.817 ; v1@110.183,101.795 ccw(c109.75,102.228) 110.363,102.228 ccw(c110.976,102.228) v1@110.543,101.795
  Bottom Layer w0.254: v1(110.363,101.615) 176.403,101.615 177.657,102.869 U7.3@177.657,108.981 ; v1@110.543,101.435 cw(c110.976,101.002) 110.976,101.615 cw(c110.976,102.228) v1@110.543,101.795 ; U7.3@177.181,108.505 cw(c176.032,107.356) 177.657,107.356 cw(c179.281,107.356) U7.3@178.133,108.505 ; U7.3@177.36,108.685 cw(c176.645,107.969) 177.657,107.969 cw(c178.668,107.969) U7.3@177.953,108.685
D_COS+2: U3.B8 U10.3 | length 107.2
  Mid2 w0.254: U3.B8@109.45,79.557 cw(c109.45,78.656) 110.087,79.293 cw(c110.723,79.93) U3.B8@109.823,79.93 ; U3.B8@109.45,79.93 110.331,79.049 110.331,57.88 v1(110.261,57.81) ; v1@110.082,57.99 ccw(c109.48,58.592) 110.331,58.592 ; 110.331,58.256 ccw(c110.707,58.256) v1@110.441,57.99
  Bottom Layer w0.254: v1(110.261,57.81) 175.844,57.81 177.677,59.643 U10.3@177.677,68.659 ; v1@110.441,57.631 cw(c110.875,57.197) 110.875,57.81 cw(c110.875,58.424) v1@110.441,57.99 ; U10.3@177.201,68.183 cw(c176.052,67.034) 177.677,67.034 cw(c179.302,67.034) U10.3@178.153,68.183 ; U10.3@177.381,68.363 cw(c176.665,67.647) 177.677,67.647 cw(c178.689,67.647) U10.3@177.973,68.363
D_COS+3: U12.3 U21.B8 | length 78.1
  Top Layer w0.254: U21.B8@109.35,31.43 109.45,31.43 110.369,30.511 110.369,27.934 111.227,27.076 175.271,27.076 177.477,24.871 U12.3@177.677,24.871 ; U21.B8@109.45,31.057 cw(c109.45,30.157) 110.087,30.793 cw(c110.723,31.43) U21.B8@109.823,31.43 ; 176.257,26.09 ccw(c177.577,27.41) U12.3@177.577,25.544 ; 176.499,25.849 cw(c175.521,24.871) U12.3@176.904,24.871 ; 176.691,25.656 ccw(c177.577,26.542) U12.3@177.577,25.29 ; 176.932,25.415 cw(c176.388,24.871) U12.3@177.158,24.871
D_COS-1: U1.C8 U7.4 | length 80.6
  Mid1 w0.254: U1.C8@109.45,121.057 cw(c109.45,120.123) 110.111,120.783 ; U1.C8@109.45,121.444 110.369,120.525 110.369,119.795 110.369,112.516 111.455,111.43 172.144,111.43 U7.4@174.592,108.981 ; U1.C8@109.823,121.43 ccw(c110.69,121.43) 110.077,120.817 ; 173.273,110.301 cw(c171.953,108.981) U7.4@173.819,108.981 ; 173.514,110.059 ccw(c174.492,111.037) U7.4@174.492,109.654 ; 173.706,109.867 cw(c172.82,108.981) U7.4@174.073,108.981 ; 173.948,109.626 ccw(c174.492,110.17) U7.4@174.492,109.4
D_COS-2: U3.C8 U10.4 | length 82.6
  Top Layer w0.254: U3.C8@109.35,81.909 U3.C8@109.35,81.93 109.45,81.93 110.331,81.049 110.331,73.669 111.331,72.669 173.838,72.669 174.613,71.894 U10.4@174.613,68.659 ; U3.C8@109.45,81.557 cw(c109.45,80.656) 110.087,81.293 cw(c110.723,81.93) U3.C8@109.823,81.93 ; U10.4@174.137,69.135 ccw(c172.988,70.284) 174.613,70.284 ccw(c176.237,70.284) U10.4@175.089,69.135 ; U10.4@174.316,68.955 ccw(c173.601,69.671) 174.613,69.671 ccw(c175.624,69.671) U10.4@174.909,68.955
D_COS-3: U12.4 U21.C8 | length 77
  Mid1 w0.254: U21.C8@109.35,33.43 109.45,33.43 110.369,32.511 110.369,28.036 111.379,27.026 172.258,27.026 174.413,24.871 U12.4@174.613,24.871 ; U21.C8@109.45,33.057 cw(c109.45,32.157) 110.087,32.793 cw(c110.723,33.43) U21.C8@109.823,33.43 ; 173.193,26.09 ccw(c174.513,27.41) U12.4@174.513,25.544 ; 173.434,25.849 cw(c172.456,24.871) U12.4@173.84,24.871 ; 173.627,25.656 ccw(c174.513,26.542) U12.4@174.513,25.29 ; 173.868,25.415 cw(c173.324,24.871) U12.4@174.094,24.871
D_EXCN1: U1.E9 U7.5 | length 83.2
  Bottom Layer w0.254: U1.E9@107.35,125.344 U1.E9@107.35,125.43 ; U1.E9@107.35,125.444 U1.E9@107.35,125.43 ; U1.E9@107.45,125.057 cw(c107.45,124.398) 107.916,124.864 ; U1.E9@107.823,125.43 ccw(c108.965,125.43) 108.157,124.623 ; U7.5@171.052,109.457 ccw(c169.903,110.606) 171.528,110.606 ccw(c173.153,110.606) U7.5@172.004,109.457 ; U7.5@171.232,109.277 ccw(c170.516,109.993) 171.528,109.993 ccw(c172.54,109.993) U7.5@171.824,109.277 ; U7.5@171.528,108.981 171.528,111.25 169.748,113.03 110.896,113.03 108.331,115.595 108.331,124.449 U1.E9@107.35,125.43
D_EXCN2: U3.E9 U10.5 | length 85.9
  Top Layer w0.254: U3.E9@107.35,85.93 107.45,85.93 108.331,85.049 108.331,72.169 109,71.5 171.172,71.5 171.548,71.123 U10.5@171.548,68.659 ; U3.E9@107.45,85.557 cw(c107.45,84.656) 108.087,85.293 cw(c108.723,85.93) U3.E9@107.823,85.93 ; U10.5@171.072,69.135 ccw(c169.924,70.284) 171.548,70.284 ccw(c173.173,70.284) U10.5@172.024,69.135 ; U10.5@171.252,68.955 ccw(c170.537,69.671) 171.548,69.671 ccw(c172.56,69.671) U10.5@171.845,68.955
D_EXCN3: U12.5 U21.E9 | length 84.3
  Mid1 w0.254: U21.E9@107.35,37.43 107.45,37.43 108.369,36.511 108.369,23.838 109.677,22.53 169.008,22.53 171.348,24.871 U12.5@171.548,24.871 ; U21.E9@107.45,37.057 cw(c107.45,36.157) 108.087,36.793 cw(c108.723,37.43) U21.E9@107.823,37.43 ; 170.129,23.651 cw(c171.448,22.331) U12.5@171.448,24.198 ; 170.37,23.892 ccw(c169.392,24.871) U12.5@170.775,24.871 ; 170.562,24.085 cw(c171.448,23.199) U12.5@171.448,24.452 ; 170.804,24.326 ccw(c170.259,24.871) U12.5@171.029,24.871
D_EXCP1: U1.D9 U7.6 | length 87.2
  Top Layer w0.254: U1.D9@107.35,123.444 107.357,123.437 108.369,122.425 108.369,106.54 109.992,104.917 167.579,104.917 168.464,105.802 U7.6@168.464,108.981 ; U1.D9@107.45,123.057 cw(c107.45,122.364) 107.94,122.854 ; U1.D9@107.823,123.43 ccw(c108.931,123.43) 108.148,122.646 ; U7.6@167.988,108.505 cw(c166.839,107.356) 168.464,107.356 cw(c170.088,107.356) U7.6@168.94,108.505 ; U7.6@168.167,108.685 cw(c167.452,107.969) 168.464,107.969 cw(c169.475,107.969) U7.6@168.76,108.685
D_EXCP2: U3.D9 U10.6 | length 99
  Mid2 w0.254: U3.D9@107.35,83.93 107.45,83.93 108.331,83.049 v1(108.331,60.376) ; U3.D9@107.45,83.557 cw(c107.45,82.656) 108.087,83.293 cw(c108.723,83.93) U3.D9@107.823,83.93 ; v1@108.151,60.555 ccw(c107.718,60.989) 108.331,60.989 ccw(c108.944,60.989) v1@108.511,60.555
  Bottom Layer w0.254: v1(108.331,60.376) 166.878,60.376 168.484,61.982 U10.6@168.484,68.659 ; v1@108.511,60.196 cw(c108.944,59.763) 108.944,60.376 cw(c108.944,60.989) v1@108.511,60.555 ; U10.6@168.008,68.183 cw(c166.859,67.034) 168.484,67.034 cw(c170.109,67.034) U10.6@168.96,68.183 ; U10.6@168.188,68.363 cw(c167.472,67.647) 168.484,67.647 cw(c169.496,67.647) U10.6@168.78,68.363
D_EXCP3: U12.6 U21.D9 | length 77.3
  Top Layer w0.254: U21.D9@107.35,35.43 107.45,35.43 108.369,34.511 108.369,25.591 109.334,24.625 168.039,24.625 168.284,24.871 U12.6@168.484,24.871 ; U21.D9@107.45,35.057 cw(c107.45,34.157) 108.087,34.793 cw(c108.723,35.43) U21.D9@107.823,35.43 ; 166.168,24.625 ccw(c166.168,27.087) U12.6@167.908,25.346 ; 166.781,24.625 ccw(c166.781,26.474) U12.6@168.088,25.167 ; 167.351,24.625 cw(c167.351,23.837) U12.6@167.908,24.395 ; 167.394,24.625 ccw(c167.394,25.86) U12.6@168.267,24.987
D_SIN+1: U1.E8 U7.1 | length 93.8
  Bottom Layer w0.254: U1.E8@109.35,125.444 U1.E8@109.35,125.43 110.331,124.449 110.331,116.237 111.963,114.605 181.813,114.605 183.785,112.633 U7.1@183.785,108.981 ; U1.E8@109.45,125.057 cw(c109.45,124.398) 109.916,124.864 ; U1.E8@109.823,125.43 ccw(c110.965,125.43) 110.157,124.623 ; U7.1@183.309,109.457 ccw(c182.161,110.606) 183.785,110.606 ccw(c185.41,110.606) U7.1@184.261,109.457 ; U7.1@183.489,109.277 ccw(c182.774,109.993) 183.785,109.993 ccw(c184.797,109.993) U7.1@184.082,109.277
D_SIN+2: U3.E8 U10.1 | length 106.2
  Top Layer w0.254: v1@109.25,67.246 cw(c109.25,66.633) 109.684,67.066 cw(c110.117,67.5) v1@109.504,67.5 ; v1(109.25,67.5) 112.25,64.5 182.966,64.5 183.806,65.34 U10.1@183.806,68.659 ; U10.1@183.33,68.183 cw(c182.181,67.034) 183.806,67.034 cw(c185.43,67.034) U10.1@184.282,68.183 ; U10.1@183.509,68.363 cw(c182.794,67.647) 183.806,67.647 cw(c184.817,67.647) U10.1@184.102,68.363
  Bottom Layer w0.254: U3.E8@108.877,85.93 cw(c107.976,85.93) 108.613,85.293 cw(c109.25,84.657) U3.E8@109.25,85.557 ; v1@108.996,67.5 ccw(c108.383,67.5) 108.816,67.934 ccw(c109.25,68.367) v1@109.25,67.754 ; v1(109.25,67.5) 108.369,68.381 108.369,85.049 109.25,85.93 U3.E8@109.35,85.93
D_SIN+3: U12.1 U21.E8 | length 94.8
  Bottom Layer w0.254: U21.E8@109.35,37.43 109.45,37.43 111.695,39.675 182.22,39.675 183.806,38.089 U12.1@183.806,24.871 ; U21.E8@109.45,37.803 ccw(c109.45,38.704) 110.087,38.067 ccw(c110.723,37.43) U21.E8@109.823,37.43 ; U12.1@183.33,25.346 ccw(c182.181,26.495) 183.806,26.495 ccw(c185.43,26.495) U12.1@184.282,25.346 ; U12.1@183.509,25.167 ccw(c182.794,25.882) 183.806,25.882 ccw(c184.817,25.882) U12.1@184.102,25.167
D_SIN-1: U1.D8 U7.2 | length 112.9
  Mid2 w0.254: v1@108.151,99.636 ccw(c107.718,100.069) 108.331,100.069 ccw(c108.944,100.069) v1@108.511,99.636 ; v1@108.204,99.456 108.267,99.52 108.331,99.583 108.331,122.525 109.243,123.437 109.343,123.437 U1.D8@109.35,123.444 ; 108.589,122.783 cw(c109.25,122.123) U1.D8@109.25,123.057 ; 108.623,122.817 ccw(c108.01,123.43) U1.D8@108.877,123.43
  Bottom Layer w0.254: v1@108.204,99.456 v1(108.331,99.456) 178.689,99.456 180.721,101.488 U7.2@180.721,108.981 ; v1@108.511,99.276 cw(c108.944,98.843) 108.944,99.456 cw(c108.944,100.069) v1@108.511,99.636 ; U7.2@180.245,108.505 cw(c179.096,107.356) 180.721,107.356 cw(c182.346,107.356) U7.2@181.197,108.505 ; U7.2@180.425,108.685 cw(c179.709,107.969) 180.721,107.969 cw(c181.733,107.969) U7.2@181.017,108.685
D_SIN-2: U3.D8 U10.2 | length 96.1
  Top Layer w0.254: v1@112.5,67.746 cw(c112.5,67.133) 112.934,67.566 cw(c113.367,68) v1@112.754,68 ; v1(112.5,68) 114.5,66 180.071,66 180.741,66.67 U10.2@180.741,68.659 ; U10.2@180.265,68.183 cw(c179.117,67.034) 180.741,67.034 cw(c182.366,67.034) U10.2@181.217,68.183 ; U10.2@180.445,68.363 cw(c179.73,67.647) 180.741,67.647 cw(c181.753,67.647) U10.2@181.038,68.363
  Bottom Layer w0.254: U3.D8@109.35,83.93 109.45,83.93 110.369,83.011 110.369,81.93 110.369,70.131 v1(112.5,68) ; U3.D8@109.45,83.557 cw(c109.45,82.656) 110.087,83.293 cw(c110.723,83.93) U3.D8@109.823,83.93 ; v1@112.246,68 ccw(c111.633,68) 112.066,68.434 ccw(c112.5,68.867) v1@112.5,68.254